# Altium PCB LY-LYJ-001V1.2.PcbDoc (part 2 of 2)
Units mm, origin at the board's own origin, x right, y up, seen from the top; angles counter-clockwise.
Board outline 190 x 47.13 mm, 2 copper layers (Top Layer, Bottom Layer); 162 components, 177 nets, 655 pads, 417 vias.
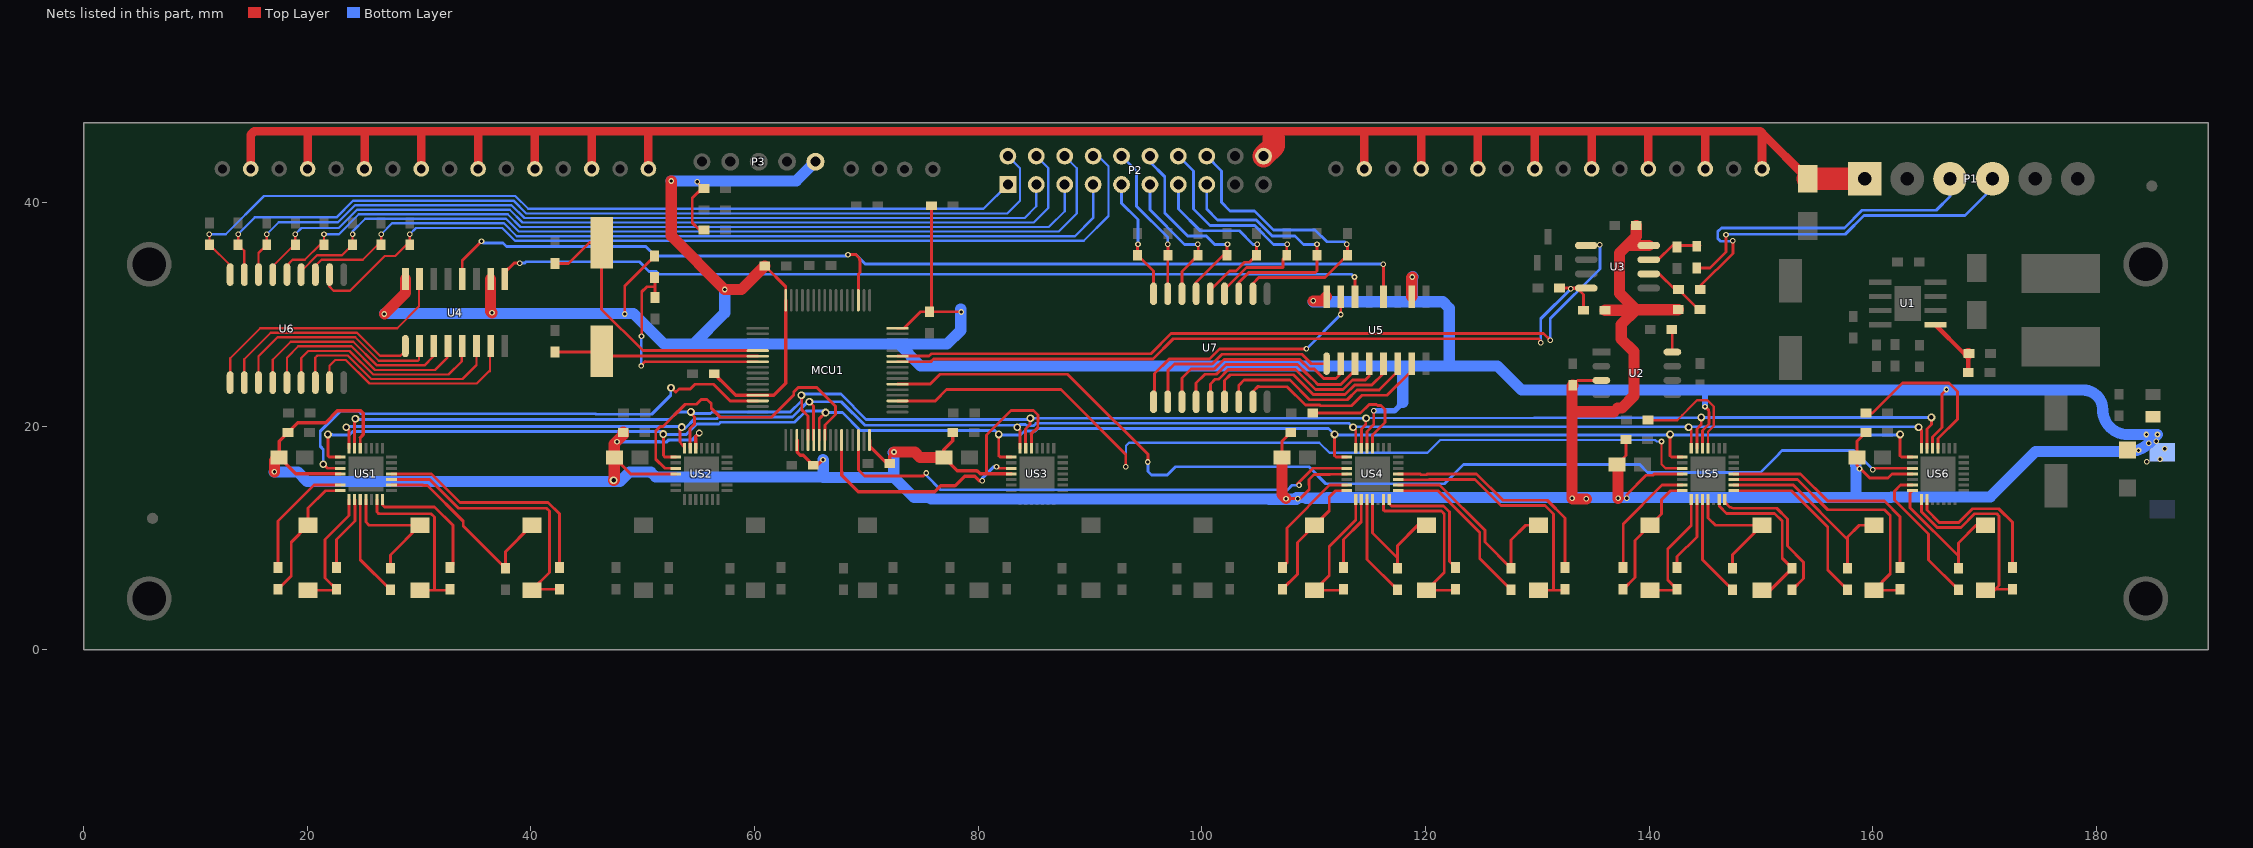
[diagram p2: the nets of this part, all layers, seen from the top]

## Via types
v1: diameter 0.5, hole 0.3, Top Layer to Bottom Layer, 382 vias
v2: diameter 0.7, hole 0.4, Top Layer to Bottom Layer, 33 vias
v3: diameter 0.6, hole 0.4, Top Layer to Bottom Layer, 2 vias

## Nets (pads, with @x,y where several pads share a name; then routed paths per layer and width w, separated by ;. In a path a pad name is that pad's centre, name@x,y a point inside that pad or via, vN(x,y) a via of type N, cw(c..) or ccw(c..) an arc to the next point about the centre after c; other vN are vias at no path point) (continued)
NetR17_2: R17.2 S3.2 US1.16 | length 18.3
  Top Layer w0.254: US1.16@27.532,14.732 30.336,14.732 30.379,14.689 30.76,14.689 33.953,11.496 33.953,11.065 R17.2@37.719,7.3 37.719,8.775 S3.2@40.08,11.136
NetR18_1: R18.1 US1.18 | length 21.3
  Top Layer w0.254: US1.18@27.533,15.732 31.103,15.732 33.667,13.168 41.541,13.168 42.545,12.164 R18.1@42.545,7.352
NetR18_2: R18.2 S3.1 US1.17 | length 25.5
  Top Layer w0.254: US1.17@27.533,15.232 30.956,15.232 33.528,12.66 41.402,12.66 41.656,12.406 41.656,6.912 S3.1@40.08,5.336 40.164,5.42 R18.2@42.545,5.42
NetR19_1: R19.1 US1.10 | length 9.2
  Top Layer w0.254: US1.10@24.74,13.445 24.74,8.06 R19.1@27.432,5.368
NetR19_2: R19.2 S2.2 US1.11 | length 11.9
  Top Layer w0.254: US1.11@25.24,13.445 25.24,11.423 25.527,11.136 S2.2@30.08,11.136 27.432,8.488 R19.2@27.432,7.3
NetR20_1: R20.1 US1.14 | length 11.4
  Top Layer w0.254: US1.14@26.74,13.443 26.74,12.971 26.924,12.787 31.369,12.787 33.02,11.136 33.02,7.606 R20.1@32.766,7.352
NetR20_2: R20.2 S2.1 US1.13 | length 15.6
  Top Layer w0.254: US1.13@26.24,13.445 26.24,12.328 26.402,12.166 31.067,12.166 31.369,11.864 31.369,5.336 ; S2.1@30.08,5.336 31.369,5.336 ; R20.2@32.682,5.336 31.369,5.336
NetR21_1: R21.1 US1.6 | length 11
  Top Layer w0.254: R21.1@17.399,7.352 17.399,11.517 20.614,14.732 US1.6@22.95,14.732
NetR21_2: R21.2 S1.2 US1.7 | length 11.9
  Top Layer w0.254: R21.2@17.399,5.42 18.567,6.589 18.567,9.624 S1.2@20.08,11.136 20.08,12.674 21.638,14.232 US1.7@22.948,14.232
NetR22_1: R22.1 US1.9 | length 6.8
  Top Layer w0.254: R22.1@22.606,7.352 22.606,9.866 24.257,11.517 24.257,13.428 US1.9@24.24,13.445
NetR22_2: R22.2 S1.1 US1.8 | length 11.9
  Top Layer w0.254: S1.1@20.08,5.336 22.522,5.336 R22.2@22.606,5.42 21.59,6.436 21.59,9.866 23.74,12.016 US1.8@23.74,13.443
NetR24_1: R24.1 U2.8 | length 2.1
  Top Layer w0.254: R24.1@142.011,28.662 142.061,28.613 U2.8@142.061,26.63
NetR26_1: R26.1 R27.2 U1.5 | length 5.8
  Top Layer w0.4: U1.5@165.58,29.066 168.143,26.503 R27.2@168.504,26.503 ; R26.1@168.528,24.725 R27.2@168.528,26.479
  Top Layer w1: R27.2@168.504,26.503 R27.2@168.528,26.479
NetR29_1: R29.1 US4.25 | length 10.9
  Top Layer w0.254: R29.1@109.918,21.169 114.176,21.169 114.96,21.953 115.607,21.953 115.705,21.855 116.002,21.855 116.357,21.499 116.357,20.331 115.251,19.225 US4.25@115.251,18.025
NetR30_1: R30.1 US5.25 | length 10.8
  Top Layer w0.203: R30.1@139.89,20.534 142.494,20.534 142.939,20.979 143.827,21.868 144.272,22.312 144.276,22.308 145.213,22.308 145.765,21.756 145.765,20.008 145.255,19.498 US5.25@145.255,18.025
NetR31_1: R31.1 US6.25 | length 15.4
  Top Layer w0.254: R31.1@159.37,21.164 159.952,21.164 162.645,23.858 166.814,23.858 167.564,23.107 167.564,20.624 165.829,18.89 US6.25@165.829,18.025
NetR35_1: R35.1 US4.15 | length 15.1
  Top Layer w0.254: US4.15@117.547,14.232 121.11,14.232 124.841,10.501 124.841,8.162 R35.1@127.635,5.368
NetR35_2: R35.2 S12.2 US4.16 | length 19.3
  Top Layer w0.254: US4.16@117.544,14.732 121.257,14.732 125.298,10.691 125.298,9.637 R35.2@127.635,7.3 127.635,9.815 128.956,11.136 S12.2@130.08,11.136
NetR36_1: R36.1 US4.18 | length 21
  Top Layer w0.254: US4.18@117.544,15.732 119.526,15.732 119.597,15.661 120.078,15.661 120.148,15.732 124.563,15.732 126.924,13.371 130.872,13.371 132.461,11.783 R36.1@132.461,7.352
NetR36_2: R36.2 S12.1 US4.17 | length 24.4
  Top Layer w0.254: US4.17@117.544,15.232 117.572,15.204 120.267,15.204 120.295,15.232 124.416,15.232 126.734,12.914 130.683,12.914 131.445,12.152 131.445,5.336 ; S12.1@130.08,5.336 131.445,5.336 ; R36.2@132.461,5.42 132.377,5.336 131.445,5.336
NetR37_1: R37.1 US4.10 | length 9.2
  Top Layer w0.254: US4.10@114.751,13.445 114.751,8.092 R37.1@117.475,5.368
NetR37_2: R37.2 S11.2 US4.11 | length 12.4
  Top Layer w0.254: US4.11@115.251,13.445 115.251,10.439 117.475,8.215 R37.2@117.475,7.3 117.475,9.307 119.304,11.136 S11.2@120.08,11.136
NetR38_1: R38.1 US4.14 | length 11.3
  Top Layer w0.254: US4.14@116.751,13.443 116.751,13.071 116.959,12.863 121.601,12.863 122.123,12.342 122.123,7.91 R38.1@122.682,7.352
NetR38_2: R38.2 S11.1 US4.13 | length 16.6
  Top Layer w0.254: US4.13@116.251,13.445 116.251,12.487 116.332,12.406 121.412,12.406 121.666,12.152 121.666,6.922 S11.1@120.08,5.336 122.598,5.336 R38.2@122.682,5.42
NetR39_1: R39.1 US4.6 | length 10.7
  Top Layer w0.254: R39.1@107.188,7.352 107.594,7.758 107.594,10.908 111.419,14.732 US4.6@112.962,14.732
NetR39_2: R39.2 S10.2 US4.7 | length 11.8
  Top Layer w0.254: R39.2@107.188,5.42 108.534,6.767 108.534,9.59 S10.2@110.08,11.136 111.379,12.435 111.379,13.676 111.935,14.232 US4.7@112.959,14.232
NetR40_1: R40.1 US4.9 | length 6.8
  Top Layer w0.254: R40.1@112.649,7.352 112.649,9.855 114.251,11.457 US4.9@114.251,13.445
NetR40_2: R40.2 S10.1 US4.8 | length 12.2
  Top Layer w0.254: R40.2@112.649,5.42 112.565,5.336 S10.1@110.08,5.336 111.379,6.635 111.379,9.231 113.751,11.604 US4.8@113.751,13.443
NetR41_1: R41.1 US5.15 | length 16.1
  Top Layer w0.254: US5.15@147.55,14.232 152.721,14.232 155.956,10.998 155.956,7.146 R41.1@157.734,5.368
NetR41_2: R41.2 S15.2 US5.16 | length 20.3
  Top Layer w0.254: US5.16@147.547,14.732 152.868,14.732 157.734,9.866 R41.2@157.734,7.3 157.734,10.095 158.775,11.136 S15.2@160.08,11.136
NetR42_1: R42.1 US5.18 | length 21
  Top Layer w0.254: US5.18@147.548,15.732 153.519,15.732 155.956,13.295 161.036,13.295 162.433,11.898 R42.1@162.433,7.352
NetR42_2: R42.2 S15.1 US5.17 | length 25
  Top Layer w0.254: US5.17@147.548,15.232 153.257,15.232 155.956,12.533 161.036,12.533 161.544,12.025 161.544,6.8 S15.1@160.08,5.336 162.349,5.336 R42.2@162.433,5.42
NetR43_1: R43.1 US5.10 | length 9.2
  Top Layer w0.254: US5.10@144.755,13.445 144.755,8.06 R43.1@147.447,5.368
NetR43_2: R43.2 S14.2 US5.11 | length 11.7
  Top Layer w0.254: US5.11@145.255,13.445 145.255,11.804 145.923,11.136 S14.2@150.08,11.136 147.447,8.503 R43.2@147.447,7.3
NetR44_1: R44.1 US5.14 | length 13.8
  Top Layer w0.254: US5.14@146.755,13.443 146.794,13.168 147.185,12.777 147.538,12.66 151.396,12.66 152.349,11.707 152.349,9.282 153.797,7.834 153.797,6.384 R44.1@152.781,5.368
NetR44_2: R44.2 S14.1 US5.13 | length 14.9
  Top Layer w0.254: US5.13@146.255,13.445 146.255,12.861 146.913,12.203 151.206,12.203 151.892,11.517 151.892,8.189 R44.2@152.781,7.3 150.817,5.336 S14.1@150.08,5.336
NetR45_1: R45.1 US5.6 | length 10.6
  Top Layer w0.254: R45.1@137.668,7.352 137.668,11.263 141.137,14.732 US5.6@142.965,14.732
NetR45_2: R45.2 S13.2 US5.7 | length 11.6
  Top Layer w0.254: R45.2@137.668,5.42 138.709,6.462 138.709,9.766 S13.2@140.08,11.136 141.097,12.153 141.097,13.422 141.907,14.232 US5.7@142.963,14.232
NetR46_1: R46.1 US5.9 | length 6.8
  Top Layer w0.254: R46.1@142.494,7.352 142.494,8.342 144.255,10.103 US5.9@144.255,13.445
NetR46_2: R46.2 S13.1 US5.8 | length 11.7
  Top Layer w0.254: S13.1@140.08,5.336 142.41,5.336 R46.2@142.494,5.42 141.656,6.259 141.656,9.028 143.755,11.127 US5.8@143.755,13.443
NetR47_1: R47.1 US6.6 | length 13
  Top Layer w0.254: US6.6@163.539,14.732 162.473,14.732 161.925,14.184 161.925,13.411 164.973,10.363 164.973,8.035 R47.1@167.64,5.368
NetR47_2: R47.2 S16.2 US6.7 | length 13.1
  Top Layer w0.254: US6.7@163.537,14.232 163.524,14.232 163.322,14.03 163.322,12.711 167.64,8.393 ; R47.2@167.64,7.3 167.64,8.393 ; S16.2@170.08,11.136 169.215,11.136 167.64,9.561 167.64,8.393
NetR48_1: R48.1 US6.9 | length 14.1
  Top Layer w0.254: US6.9@164.829,13.445 164.829,12.497 165.936,11.39 167.67,11.39 168.904,12.624 171.256,12.624 172.466,11.414 R48.1@172.466,7.352
NetR48_2: R48.2 S16.1 US6.8 | length 19.2
  Top Layer w0.254: US6.8@164.329,13.443 164.329,12.35 165.747,10.933 167.86,10.933 169.093,12.166 171.067,12.166 171.26,11.973 171.26,5.739 170.857,5.336 S16.1@170.08,5.336 170.164,5.42 R48.2@172.466,5.42
NetR49_2: R49.2 R51.2 U3.7 | length 5.1
  Top Layer w0.254: U3.7@139.954,34.885 140.792,34.885 142.063,36.156 142.494,36.156 R49.2@144.526,36.156
NetR50_2: R50.2 R52.2 U3.6 | length 5.9
  Top Layer w0.254: U3.6@139.954,33.615 140.894,33.615 142.291,32.218 R50.2@142.62,32.218 144.398,30.44 R52.2@144.527,30.44
NetU4_9: U4.9 U5.14 | length 79.4
  Top Layer w0.254: U4.9@37.668,33.164 37.668,33.768 38.506,34.606 38.532,34.58 v1(39.014,34.58) ; v1(113.64,33.336) 113.69,33.285 U5.14@113.69,31.589
  Bottom Layer w0.254: v1(39.014,34.58) 39.446,34.58 39.573,34.707 49.698,34.707 50.566,33.84 51.213,33.84 51.463,33.59 113.386,33.59 v1@113.69,33.285
NRST: C23.2 MCU1.7 R53.1 | length 20.4
  Top Layer w0.254: v1(49.86,25.386) 49.86,25.436 50.216,25.792 50.248,25.76 MCU1.7@60.282,25.76 ; v1(49.886,28.027) 49.911,28.053 49.911,32.015 50.368,32.472 51.058,32.472 51.083,32.447 ; R53.1@51.068,33.285 51.083,33.27 51.083,32.447 ; C23.2@51.083,31.503 51.083,32.447
  Bottom Layer w0.254: v1(49.86,25.386) v1@49.86,28.027
OSC8MIN: C21.2 MCU1.5 X1.1 | length 26.4
  Top Layer w0.254: C21.2@42.151,34.534 43.362,34.534 45.237,36.409 X1.1@46.321,36.409 46.321,30.448 50.009,26.76 MCU1.5@60.282,26.76
OSC8MOUT: C20.2 MCU1.6 X1.2 | length 18.3
  Top Layer w0.254: C20.2@42.151,26.634 46.274,26.634 X1.2@46.321,26.681 46.742,26.26 MCU1.6@60.282,26.26
OUT1: P2.1 R59.1 U6.18 | length 78.6
  Top Layer w0.203: v1(11.252,37.171) 11.269,37.155 R59.1@11.269,36.231 13.106,34.394 U6.18@13.106,33.554
  Bottom Layer w0.203: v1(11.252,37.171) 12.725,37.171 16.129,40.575 38.611,40.575 39.754,39.432 80.472,39.432 P2.1@82.652,41.611
OUT2: P2.2 R60.1 U6.17 | length 80.4
  Top Layer w0.203: v1(13.818,37.171) 13.826,37.163 R60.1@13.826,36.231 14.376,35.681 U6.17@14.376,33.554
  Bottom Layer w0.203: v1(13.818,37.171) 15.316,38.67 22.609,38.67 24.108,40.168 38.443,40.168 39.586,39.025 82.601,39.025 83.73,40.155 83.73,43.073 P2.2@82.652,44.151
OUT3: P2.3 R61.1 U6.16 | length 76.7
  Top Layer w0.203: U6.16@15.646,33.554 15.646,35.495 R61.1@16.383,36.231 v1(16.383,37.171)
  Bottom Layer w0.203: v1(16.383,37.171) 17.449,38.238 22.752,38.238 24.276,39.762 38.275,39.762 39.418,38.619 84.15,38.619 85.192,39.66 P2.3@85.192,41.611
OUT4: P2.4 R62.1 U6.15 | length 78.8
  Top Layer w0.203: U6.15@16.916,33.554 16.916,34.301 18.847,36.231 R62.1@18.94,36.231 v1(18.94,37.171)
  Bottom Layer w0.203: v1(18.94,37.171) 19.494,37.726 22.815,37.726 24.444,39.356 38.106,39.356 39.249,38.213 84.963,38.213 86.258,39.508 86.258,43.084 P2.4@85.192,44.151
OUT5: P2.5 R63.1 U6.14 | length 76.3
  Top Layer w0.203: U6.14@18.186,33.554 18.186,34.377 18.684,34.875 19.776,34.875 21.133,36.231 R63.1@21.497,36.231 v1(21.497,37.171)
  Bottom Layer w0.203: v1(21.497,37.171) 22.835,37.171 24.613,38.949 37.938,38.949 39.081,37.806 86.309,37.806 87.732,39.229 P2.5@87.732,41.611
OUT6: P2.6 R64.1 U6.13 | length 79
  Top Layer w0.203: U6.13@19.456,33.554 19.456,33.857 20.88,35.281 23.103,35.281 R64.1@24.053,36.231 v1(24.053,37.171)
  Bottom Layer w0.203: v1(24.053,37.171) 24.053,37.399 25.197,38.543 37.77,38.543 38.913,37.4 87.198,37.4 88.81,39.012 88.81,43.073 P2.6@87.732,44.151
OUT7: P2.7 R65.1 U6.12 | length 76.6
  Top Layer w0.203: U6.12@20.726,33.554 20.726,34.326 21.275,34.875 24.958,34.875 26.314,36.231 R65.1@26.61,36.231 v1(26.61,37.171)
  Bottom Layer w0.203: v1(26.61,37.171) 27.576,38.136 37.601,38.136 38.744,36.993 88.646,36.993 90.272,38.619 P2.7@90.272,41.611
OUT8: P2.8 R66.1 U6.11 | length 81.4
  Top Layer w0.203: U6.11@21.996,33.554 21.996,32.574 21.946,32.523 22.352,32.117 23.825,32.117 26.924,35.215 27.864,35.215 28.88,36.231 R66.1@29.167,36.231 v1(29.167,37.171)
  Bottom Layer w0.203: v1(29.167,37.171) 29.726,37.73 37.433,37.73 38.576,36.587 89.433,36.587 91.643,38.797 91.643,43.242 90.734,44.151 P2.8@90.272,44.151
OUT9: P2.9 R67.1 U7.18 | length 11
  Top Layer w0.254: v1(94.285,36.257) 94.251,36.223 R67.1@94.251,35.292 95.673,33.869 U7.18@95.673,31.837
  Bottom Layer w0.254: P2.9@92.812,41.611 92.812,39.94 94.285,38.467 v1(94.285,36.257)
OUT10: P2.10 R68.1 U7.17 | length 14
  Top Layer w0.254: U7.17@96.943,31.837 96.943,35.275 R68.1@96.96,35.292 96.96,36.249 v1(96.952,36.257)
  Bottom Layer w0.254: P2.10@92.812,44.151 94.158,42.805 94.158,39.66 96.952,36.866 v1(96.952,36.257)
OUT11: P2.11 R69.1 U7.16 | length 12.8
  Top Layer w0.254: U7.16@98.213,31.837 98.213,33.835 R69.1@99.669,35.292 99.669,36.206 v1(99.619,36.257)
  Bottom Layer w0.254: P2.11@95.352,41.611 95.352,39.356 98.45,36.257 v1(99.619,36.257)
OUT12: P2.12 R70.1 U7.15 | length 18.2
  Top Layer w0.254: U7.15@99.483,31.837 99.483,32.844 101.93,35.292 R70.1@102.252,35.292 102.252,36.223 v1(102.286,36.257)
  Bottom Layer w0.254: P2.12@95.352,44.151 95.352,43.623 96.672,42.302 96.672,39.076 98.73,37.019 100.381,37.019 101.143,36.257 v1(102.286,36.257)
OUT13: P2.13 R71.1 U7.14 | length 17.3
  Top Layer w0.254: U7.14@100.753,31.837 100.753,32.176 102.456,33.879 103.035,33.879 103.812,34.657 104.241,34.657 R71.1@104.876,35.292 104.876,36.18 v1(104.953,36.257)
  Bottom Layer w0.254: P2.13@97.892,41.611 97.892,39.432 99.847,37.476 103.353,37.476 104.572,36.257 v1(104.953,36.257)
OUT14: P2.14 R72.1 U7.13 | length 23.6
  Top Layer w0.254: U7.13@102.023,31.837 102.023,32.221 104.001,34.199 107.239,34.199 107.239,34.945 R72.1@107.586,35.292 107.586,36.223 v1(107.62,36.257)
  Bottom Layer w0.254: P2.14@97.892,44.151 99.238,42.805 99.238,39.432 100.736,37.933 104.724,37.933 106.401,36.257 v1(107.62,36.257)
OUT15: P2.15 R73.1 U7.12 | length 24.2
  Top Layer w0.254: U7.12@103.293,31.837 103.293,32.844 104.191,33.742 110.16,33.742 110.295,33.877 R73.1@110.295,35.292 110.295,36.249 v1(110.287,36.257)
  Bottom Layer w0.254: P2.15@100.432,41.611 100.432,39.406 101.397,38.441 104.863,38.441 106.285,37.019 108.331,37.019 109.093,36.257 v1(110.287,36.257)
OUT16: P2.16 R74.1 U7.11 | length 28.8
  Top Layer w0.254: U7.11@104.563,31.837 104.563,32.768 105.08,33.285 110.998,33.285 R74.1@113.004,35.292 113.004,36.206 v1(112.954,36.257)
  Bottom Layer w0.254: P2.16@100.432,44.151 101.752,42.83 101.752,40.016 102.514,39.254 104.697,39.254 106.398,37.552 110.109,37.552 111.176,36.485 112.725,36.485 v1(112.954,36.257)
OUTA: P1.3 R50.1 | length 31.3
  Top Layer w0.254: R50.1@144.551,32.218 144.551,32.521 147.472,35.442 v1(147.472,36.587)
  Bottom Layer w0.254: v1(147.472,36.587) 147.426,36.54 146.376,36.54 146.126,36.79 146.126,37.4 146.456,37.73 157.443,37.73 159.018,39.305 165.659,39.305 166.889,40.535 P1.3@166.889,42.124
OUTB: P1.4 R49.1 | length 31.1
  Top Layer w0.254: R49.1@144.247,34.149 145.44,34.149 146.863,35.571 v1(146.863,37.12)
  Bottom Layer w0.254: v1(146.863,37.12) 146.91,37.167 157.527,37.167 159.207,38.848 168.224,38.848 170.688,41.311 P1.4@170.688,42.124
S_LED1: U4.15 U6.1 | length 23.8
  Top Layer w0.203: U6.1@13.106,23.902 13.106,26.071 15.799,28.764 28.042,28.764 29.997,30.72 U4.15@29.997,33.57
S_LED2: U4.1 U6.2 | length 19.8
  Top Layer w0.203: U6.2@14.376,23.43 14.376,25.995 16.739,28.357 24.46,28.357 26.518,26.3 28.346,26.3 28.727,26.681 U4.1@28.727,27.57
S_LED3: U4.2 U6.3 | length 20.4
  Top Layer w0.203: U6.3@15.646,23.43 15.646,26.249 17.348,27.951 24.292,27.951 26.4,25.843 29.896,25.843 29.997,25.944 U4.2@29.997,27.57
S_LED4: U4.3 U6.4 | length 20.1
  Top Layer w0.203: U6.4@16.916,23.43 16.916,25.944 18.517,27.545 24.124,27.545 26.232,25.436 30.48,25.436 31.267,26.224 U4.3@31.267,27.57
S_LED5: U4.4 U6.5 | length 20.2
  Top Layer w0.203: U6.5@18.186,23.43 18.186,26.122 19.202,27.138 23.955,27.138 26.063,25.03 31.42,25.03 32.537,26.148 U4.4@32.537,27.57
S_LED6: U4.5 U6.6 | length 20.4
  Top Layer w0.203: U6.6@19.456,23.43 19.456,26.097 20.091,26.732 23.787,26.732 25.895,24.624 32.639,24.624 33.807,25.792 U4.5@33.807,27.57
S_LED7: U4.6 U6.7 | length 20.2
  Top Layer w0.203: U6.7@20.726,23.902 20.726,26.122 20.93,26.325 23.619,26.325 25.727,24.217 33.884,24.217 35.128,25.462 35.128,27.519 U4.6@35.077,27.57
S_LED8: U4.7 U6.8 | length 20.1
  Top Layer w0.203: U6.8@21.996,23.902 21.996,25.411 22.504,25.919 23.45,25.919 25.558,23.811 35.154,23.811 36.297,24.954 36.347,24.903 U4.7@36.347,27.57
S_LED9: U5.15 U7.1 | length 23
  Top Layer w0.254: U7.1@95.673,22.185 95.758,22.27 95.758,24.7 97.079,26.021 100.686,26.021 101.575,26.91 v1(109.347,26.91) ; v1(112.42,29.983) U5.15@112.42,31.589
  Bottom Layer w0.254: v1(109.347,26.91) v1(112.42,29.983)
S_LED10: U5.1 U7.2 | length 17.9
  Top Layer w0.254: U7.2@96.943,22.185 96.977,22.219 96.977,25.005 97.536,25.563 100.875,25.563 100.9,25.589 100.944,25.589 101.782,26.427 108.938,26.427 109.777,25.589 U5.1@111.15,25.589
S_LED11: U5.2 U7.3 | length 18.8
  Top Layer w0.254: U7.3@98.213,22.185 98.213,24.31 99.009,25.106 101.064,25.106 101.09,25.132 101.133,25.132 101.972,25.97 108.749,25.97 109.613,25.106 110.042,25.106 110.889,24.259 111.979,24.259 112.42,24.7 U5.2@112.42,25.589
S_LED12: U5.3 U7.4 | length 18.4
  Top Layer w0.254: U7.4@99.483,22.185 99.483,23.853 100.279,24.649 101.254,24.649 101.279,24.674 101.323,24.674 102.161,25.513 108.56,25.513 109.423,24.649 109.449,24.649 110.236,23.862 110.236,23.836 110.338,23.735 112.42,23.735 113.69,25.005 U5.3@113.69,25.589
S_LED13: U5.4 U7.5 | length 18.7
  Top Layer w0.254: U7.5@100.753,22.185 100.753,23.777 101.168,24.192 101.443,24.192 101.469,24.217 101.512,24.217 102.35,25.055 108.37,25.055 110.148,23.277 112.61,23.277 113.473,24.141 114.605,24.141 114.96,24.497 U5.4@114.96,25.589
S_LED14: U5.5 U7.6 | length 18.7
  Top Layer w0.254: U7.6@102.023,22.185 102.023,24.081 102.54,24.598 108.181,24.598 109.959,22.82 112.799,22.82 113.663,23.684 115.189,23.684 116.23,24.725 U5.5@116.23,25.589
S_LED15: U5.6 U7.7 | length 18.4
  Top Layer w0.254: U7.7@103.293,22.185 103.293,23.65 103.762,24.119 107.852,24.119 107.861,24.128 109.626,22.363 112.989,22.363 113.852,23.227 115.849,23.227 117.5,24.878 U5.6@117.5,25.589
S_LED16: U5.7 U7.8 | length 17.9
  Top Layer w0.254: U7.8@104.563,22.185 104.563,23.091 105.042,23.57 105.08,23.531 107.62,23.531 109.252,21.899 110.538,21.899 110.607,21.83 113.36,21.83 114.3,22.769 116.561,22.769 118.77,24.979 U5.7@118.77,25.589
SPI_CLK: MCU1.21 US1.27 US2.27 US3.27 US4.27 US5.27 US6.27 | length 165.2
  Top Layer w0.254: US1.27@24.24,18.025 v2@24.24,20.594 ; US2.27@54.238,18.05 54.238,19.781 54.635,20.179 54.635,20.814 54.305,21.144 v2(54.305,21.271) ; v2(64.186,22.769) 64.287,22.668 64.287,22.538 64.217,22.467 64.217,21.468 64.782,20.903 MCU1.21@64.782,18.76 ; US3.27@84.235,18.025 84.235,19.755 84.633,20.153 v2(84.658,20.712) ; US4.27@114.258,18.025 114.258,19.755 114.656,20.153 v2(114.681,20.712) ; US5.27@144.255,18.025 144.255,19.755 144.653,20.153 v2(144.653,20.788) ; US6.27@164.829,18.025 164.829,19.755 165.227,20.153 v2(165.227,20.788)
  Bottom Layer w0.254: v2(24.308,20.661) 24.364,20.605 51.825,20.605 51.839,20.591 52.403,20.591 53.083,21.271 v2(54.305,21.271) 54.453,21.123 56.063,21.123 56.21,21.271 63.195,21.271 64.186,22.261 v2(64.186,22.769) 64.282,22.865 67.722,22.865 69.977,20.61 84.455,20.61 v2(84.658,20.712) v2(114.681,20.712) v2(144.653,20.788) v2(165.227,20.788)
SPI_EN1: MCU1.14 US1.3 | length 47.2
  Top Layer w0.254: v2(21.438,16.597) 21.803,16.232 US1.3@22.95,16.232 ; v2(52.527,23.43) 52.527,23.455 52.934,23.049 52.95,23.049 53.229,23.328 54.243,23.328 54.67,23.755 56.328,23.755 57.823,22.26 MCU1.14@60.282,22.26
  Bottom Layer w0.254: v2(21.438,16.597) 21.438,17.929 21.164,18.203 21.164,19.546 22.959,21.341 24.59,21.341 24.813,21.118 45.771,21.118 45.822,21.068 50.8,21.068 52.502,22.769 v2@52.502,23.481
SPI_EN2: MCU1.24 US2.3 | length 28.1
  Top Layer w0.254: US2.3@52.954,16.232 51.978,16.232 51.161,17.049 51.161,19.571 51.56,19.97 51.81,19.97 53.797,21.957 54.811,21.957 55.238,22.384 55.76,22.384 56.129,22.014 56.129,21.606 56.932,20.803 61.508,20.803 63.506,22.8 63.506,23.051 63.904,23.45 65.563,23.45 67.234,21.779 67.234,21.042 66.282,20.091 MCU1.24@66.282,18.76
SPI_EN3: MCU1.27 US3.3 | length 20.4
  Top Layer w0.203: v1(81.636,16.369) 81.772,16.232 US3.3@82.958,16.232
  Top Layer w0.254: 67.782,15.922 MCU1.27@67.782,18.76
  Top Layer w0.3: 67.782,15.922 67.782,15.612 69.259,14.136 76.106,14.136 76.637,14.667 77.927,14.667 78.784,15.524 79.68,15.524 80.08,15.124 v1(80.366,15.124)
  Bottom Layer w0.3: v1(80.366,15.124) 80.366,15.327 81.407,16.369 v1(81.636,16.369)
SPI_EN4: MCU1.30 US4.3 | length 48.3
  Top Layer w0.254: MCU1.30@69.282,18.76 69.282,16.084 69.836,15.53 75.082,15.53 v1(75.362,15.81) ; v1@108.55,14.854 109.928,16.232 US4.3@112.962,16.232
  Bottom Layer w0.254: v1(75.362,15.81) 75.362,15.581 76.632,14.311 106.807,14.311 ; 106.815,14.303 107.637,14.303 108.052,14.718 v1(108.687,14.718)
SPI_EN5: MCU1.35 US5.3 | length 79.1
  Top Layer w0.203: v1(141.097,18.629) 141.097,16.597 141.453,16.242 ; 141.462,16.232 US5.3@142.965,16.232
  Top Layer w0.254: MCU1.35@72.782,22.26 76.15,22.26 77.157,23.267 87.386,23.267 93.189,17.465 93.189,16.466 93.174,16.452 v1@93.203,16.452
  Bottom Layer w0.203: v1(93.203,16.369) 93.203,18.259 93.472,18.528 110.492,18.528 111.402,17.617 120.165,17.617 121.319,18.772 140.523,18.772 140.665,18.629 v1(141.097,18.629)
SPI_EN6: MCU1.38 US6.3 | length 99.2
  Top Layer w0.254: MCU1.38@72.782,23.76 75.71,23.76 76.589,24.639 87.982,24.639 92.271,20.35 92.31,20.35 95.174,17.486 v1@95.174,16.826 ; v1(159.995,16.115) 160.112,16.232 US6.3@163.539,16.232
  Bottom Layer w0.254: v1(95.165,16.8) 95.165,15.945 95.479,15.632 96.901,15.632 97.638,16.369 109.564,16.369 111.074,14.859 121.68,14.859 123.382,16.561 139.156,16.561 139.856,15.861 149.942,15.861 151.609,17.528 151.609,17.558 151.867,17.816 158.293,17.816 v1(159.995,16.115)
SPI_MISO: MCU1.22 US1.28 US2.28 US3.28 US4.28 US5.28 US6.28 | length 158.6
  Top Layer w0.254: v2(23.495,19.899) 23.74,19.654 US1.28@23.74,18.028 ; v2(53.492,19.925) 53.331,19.763 53.331,18.587 US2.28@53.738,18.053 ; v2(64.897,22.185) 65.282,21.8 MCU1.22@65.282,18.76 ; v2(83.49,19.899) 83.735,19.654 US3.28@83.735,18.028 ; v2(113.513,19.899) 113.758,19.654 US4.28@113.758,18.028 ; v2(143.51,19.899) 143.755,19.654 US5.28@143.755,18.028 ; v2(164.084,19.899) 164.329,19.654 US6.28@164.329,18.028
  Bottom Layer w0.254: v2(23.495,19.899) 23.566,19.97 53.447,19.97 v2(53.492,19.925) 53.512,19.944 53.659,19.798 53.794,19.798 54.658,20.661 56.617,20.661 56.769,20.814 63.385,20.814 64.756,22.185 v2(64.897,22.185) 67.756,22.185 69.864,20.077 83.312,20.077 v2(83.49,19.899) 83.744,20.153 84.218,20.153 84.316,20.055 84.335,20.073 84.376,20.032 84.94,20.032 85.163,20.255 113.157,20.255 v2(113.513,19.899) 113.558,19.944 164.039,19.944 v2(164.084,19.899)
SPI_MOSI: MCU1.23 US1.1 US2.1 US3.1 US4.1 US5.1 US6.1 | length 164.3
  Top Layer w0.254: v2(21.844,19.264) 21.844,17.359 21.971,17.232 US1.1@22.95,17.232 ; v2(51.841,19.29) 51.841,17.385 51.968,17.258 US2.1@52.948,17.258 ; MCU1.23@65.782,18.76 65.782,20.658 v2(66.345,21.22) ; v2(81.839,19.264) 81.839,17.359 81.966,17.232 US3.1@82.945,17.232 ; v2(111.862,19.264) 111.862,17.359 111.989,17.232 US4.1@112.968,17.232 ; v2(141.859,19.264) 141.859,17.359 141.986,17.232 US5.1@142.965,17.232 ; v2(162.433,19.264) 162.433,17.359 162.56,17.232 US6.1@163.539,17.232
  Bottom Layer w0.254: v2(21.844,19.264) 22.262,19.264 22.262,19.219 23.777,19.219 24.07,19.513 51.618,19.513 v2(51.841,19.29) 51.887,19.244 53.887,19.244 54.847,20.204 56.806,20.204 56.958,20.356 63.574,20.356 64.59,21.372 66.192,21.372 v2(66.345,21.22) 67.849,21.22 69.449,19.62 81.483,19.62 v2(81.839,19.264) 81.884,19.219 83.772,19.219 84.127,19.575 85.129,19.575 85.352,19.798 111.328,19.798 v2(111.862,19.264) 111.907,19.219 141.814,19.219 v2(141.859,19.264) 141.904,19.219 162.388,19.219 v2(162.433,19.264)
STR_595: MCU1.51 U4.12 U5.12 | length 93.5
  Top Layer w0.254: U4.12@33.858,33.164 33.858,34.809 v1(35.585,36.536) ; v1(68.351,35.338) 69.049,35.338 69.389,34.999 69.389,34.885 69.414,34.86 69.414,33.736 69.282,33.604 MCU1.51@69.282,31.26 ; v1(116.205,34.479) 116.23,34.453 U5.12@116.23,31.589
  Bottom Layer w0.254: v1(35.585,36.536) 35.738,36.384 37.516,36.384 37.821,36.079 50.267,36.079 51.134,35.211 68.224,35.211 v1(68.351,35.338) 69.071,35.338 69.901,34.508 116.176,34.508 v1(116.205,34.479)
USART1_RX: MCU1.43 U3.1 | length 69.8
  Top Layer w0.254: MCU1.43@72.782,26.26 75.603,26.26 75.821,26.478 95.439,26.478 97.243,28.281 130.556,28.281 v1(131.14,27.697)
  Bottom Layer w0.254: v1(131.14,27.697) 131.14,29.62 135.585,34.065 v1(135.585,36.231)
USART1_TX: MCU1.42 R33.1 R34.2 U3.4 | length 69.4
  Top Layer w0.254: MCU1.42@72.782,25.76 75.75,25.76 76,26.01 78.653,26.01 78.664,26.021 95.629,26.021 97.432,27.824 130.099,27.824 130.308,27.614 130.162,27.468 v1(130.302,27.468) ; R33.1@131.978,32.345 U3.4@133.934,32.345 ; v1(132.994,32.294) 133.579,32.294 134.111,31.762 R34.2@134.111,30.364
  Bottom Layer w0.254: v1(130.302,27.468) 130.302,29.602 v1(132.994,32.294)
VCC3.3V: C2.2 C3.2 C4.2 C5.2 C6.2 C7.2 C8.1 C14.2 C15.2 C16.2 C17.2 C18.2 C19.2 C22.1 C24.1 C25.2 C26.2 C27.1 C30.1 L2.2 MCU1.13 MCU1.19 MCU1.32 MCU1.48 MCU1.64 P3.1 R28.2 R32.1 R34.1 R52.1 R53.2 R55.1 R58.1 TVS1.2 U2.3 U3.8 U4.10 U4.16 U5.10 U5.16 US1.4 US1.26 US2.4 US2.26 US3.4 US3.26 US4.4 US4.26 US5.4 US5.26 US6.4 US6.26 | length 641.8
  Top Layer w0.254: US1.26@24.74,18.025 24.74,18.985 ; C5.2@47.456,17.207 48.931,15.732 US2.4@52.954,15.732 ; v1(48.387,30.034) 48.387,32.535 R53.2@51.068,35.216 ; v1(54.864,41.845) R58.1@55.474,41.235 55.27,41.235 54.432,40.397 54.432,38.187 55.067,37.552 R55.1@55.474,37.552 ; C24.1@60.909,34.314 60.947,34.314 62.789,32.472 62.782,32.466 MCU1.64@62.782,31.26 ; MCU1.32@70.307,18.07 MCU1.32@70.307,18.735 ; MCU1.48@72.782,28.76 73.351,28.76 74.828,30.237 C27.1@75.629,30.237 ; R28.2@75.818,39.711 75.818,30.427 cw(c75.629,30.427) C27.1@75.629,30.237 ; v1(78.486,30.212) 78.461,30.237 C27.1@75.629,30.237 ; 80.747,15.732 80.747,19.213 82.925,21.392 84.94,21.392 85.338,20.994 85.338,20.398 85.323,20.383 85.323,19.879 ; US3.26@84.748,18.025 84.748,19.303 ; C17.2@107.154,17.207 107.154,18.659 C14.2@107.95,19.455 ; v1(107.518,13.524) 108.788,13.524 109.597,14.333 109.597,14.739 109.58,14.757 109.58,15.237 110.032,15.689 111.448,15.689 111.461,15.702 112.932,15.702 US4.4@112.962,15.732 ; US4.26@114.751,18.025 114.751,19.528 115.361,20.138 115.361,21.367 v1(115.367,21.372) ; C8.1@133.16,23.658 133.591,24.09 U2.3@135.714,24.09 ; v1(137.211,13.549) v1(137.998,13.549) 137.998,13.894 139.711,15.607 140.311,15.607 140.436,15.732 US5.4@142.965,15.732 ; C18.2@137.211,16.487 C18.2@137.126,16.572 137.922,17.368 C15.2@137.922,18.82 ; US5.26@144.755,18.025 144.755,19.609 145.333,20.187 145.333,21.256 145.313,21.276 145.313,21.423 v1(144.983,21.753) v1@144.932,21.753 ; C16.2@159.385,19.455 158.589,18.659 C19.2@158.589,17.207 158.589,16.504 159.715,15.378 161.341,15.378 161.695,15.732 US6.4@163.539,15.732 ; US6.26@165.329,18.025 165.329,19.036 166.167,19.874 166.167,22.871 v1(166.573,23.277)
  Top Layer w0.3: US1.4@22.95,15.732 18.966,15.732 C7.2@17.492,17.207 17.492,18.659 C4.2@18.288,19.455 19.138,20.306 21.641,20.306 22.7,21.364 24.798,21.364 25.011,21.152 25.011,19.256 24.74,18.985 ; US2.26@54.744,18.025 54.744,18.867 54.718,18.893 54.718,19.067 v3(55.042,19.391) ; C22.1@56.388,24.687 56.998,24.078 57.006,24.078 58.324,22.76 MCU1.13@60.282,22.76 61.713,22.76 62.782,23.83 MCU1.64@62.782,31.26 ; MCU1.19@63.802,18.76 63.802,17.69 64.085,17.407 64.35,17.407 C26.2@65.248,16.508 65.621,16.508 v1(66.116,17.004) ; MCU1.32@70.307,18.07 70.443,18.07 C25.2@72.106,16.407 ; C25.2@72.081,16.661 72.081,17.304 v1(72.466,17.689) ; C3.2@77.724,19.455 77.724,18.68 76.928,17.884 C6.2@76.928,17.207 78.107,16.027 79.888,16.027 80.183,15.732 80.747,15.732 US3.4@82.958,15.732 ; 84.748,19.303 85.323,19.879
  Top Layer w1: v1(17.069,15.926) 17.069,16.784 cw(c17.492,16.784) C7.2@17.492,17.207 ; v1(26.899,30.034) 28.778,31.913 U4.16@28.778,33.164 ; U4.10@36.398,33.164 36.398,30.262 v1(36.525,30.135) ; v2(47.396,15.164) ccw(c47.396,15.224) 47.456,15.224 C5.2@47.456,17.207 ; C5.2@47.396,17.147 C5.2@47.456,17.207 ; C2.2@48.252,19.455 48.252,19.231 47.422,18.401 47.456,18.366 C5.2@47.456,17.207 ; v1(52.553,41.921) 52.553,36.993 v1(57.328,32.218) 58.814,32.218 C24.1@60.909,34.314 ; v1(72.466,17.689) 74.32,17.689 74.803,17.207 C6.2@76.928,17.207 ; C17.2@107.154,17.207 107.154,13.888 v1(107.518,13.524) ; v1(109.957,31.202) 110.764,31.202 U5.16@111.15,31.589 ; U5.10@118.77,31.589 118.77,33.285 v1(118.821,33.336) ; C8.1@133.16,23.658 133.096,23.595 133.096,21.296 ; v1(134.366,13.498) 133.147,13.498 v1(133.096,13.549) 133.096,21.296 ; R34.1@136.042,30.364 138.76,30.364 ; v1(137.211,13.549) C18.2@137.211,16.487 ; R32.1@138.836,37.933 138.836,36.968 138.024,36.155 ; U3.8@139.954,36.155 138.024,36.155 ; R52.1@142.596,30.44 142.57,30.415 138.811,30.415 ; 133.096,21.296 136.844,21.296 137.185,21.637 137.552,21.637 138.633,22.719 138.633,26.656 137.49,27.799 137.49,29.094 138.76,30.364 ; 138.024,36.155 137.338,35.469 137.338,31.888 138.811,30.415 ; 138.76,30.364 138.811,30.415
  Bottom Layer w0.254: 144.983,22.871 145.339,23.227
  Bottom Layer w0.3: v1(47.701,18.604) 51.533,18.604 51.55,18.586 52.133,18.586 52.31,18.764 54.415,18.764 v3(55.042,19.391)
  Bottom Layer w0.5: v1(115.367,21.372) 117.221,21.372 117.958,22.109 ; v1(144.983,21.753) 144.983,22.871
  Bottom Layer w1: v1@17.057,15.898 19.163,15.898 19.999,15.062 47.968,15.062 48.805,15.899 50.712,15.899 51.168,15.443 66.142,15.443 66.142,16.978 v1(66.116,17.004) ; v1@26.899,30.085 49.176,30.085 51.919,27.341 54.559,27.341 ; v1(52.553,41.921) 63.72,41.921 P3.1@65.447,43.648 ; v1(57.328,32.218) 57.328,30.11 54.559,27.341 ; 66.142,15.418 72.441,15.418 72.441,17.588 v1@72.39,17.639 ; 72.39,15.494 74.259,13.625 75.802,13.625 75.802,13.481 105.985,13.481 105.985,13.473 108.467,13.473 108.467,13.625 109.308,13.625 109.308,13.561 109.861,13.561 109.865,13.557 110.658,13.557 110.662,13.561 111.215,13.561 111.215,13.625 158.496,13.625 ; 78.435,30.466 78.435,28.561 77.216,27.341 72.898,27.341 ; v1@109.957,31.126 118.821,31.126 ; 117.958,22.109 117.958,24.776 117.348,25.386 ; v1@118.847,33.361 v1(118.821,33.336) 118.821,31.126 ; 158.455,16.48 158.496,16.439 158.496,13.625 ; 54.559,27.341 72.898,27.341 ; 72.898,27.341 74.854,25.386 117.348,25.386 ; 117.348,25.386 122.123,25.386 ; 118.821,31.126 121.539,31.126 122.123,30.542 122.123,25.386 ; 122.123,25.386 126.416,25.386 128.575,23.227 145.339,23.227 178.805,23.227 cw(c178.805,21.488) 180.543,21.488 ccw(c182.778,21.488) 182.778,19.253 v1(185.445,19.253) v1(184.665,18.473) cw(c182.869,20.269) 182.869,17.729 174.538,17.729 170.485,13.676 161.671,13.676 161.62,13.625 158.496,13.625
  other v1: 108.56,13.498 158.801,16.191 184.48,16.815 185.674,17.043 183.744,17.831 186.08,17.983 185.344,18.644 184.455,19.253
VCC_IN: D1.1 LED3.A LED4.A LED5.A LED6.A LED7.A LED8.A LED9.A LED10.A LED11.A LED12.A LED13.A LED14.A LED15.A LED16.A LED17.A LED18.A P1.1 P2.20 | length 202.6
  Top Layer w0.762: LED3.A@14.953,43.003 14.953,46.054 15.265,46.366 20.244,46.366 ; LED4.A@20.033,43.003 20.033,46.156 20.244,46.366 ; LED5.A@25.164,42.901 25.164,46.054 ; LED6.A@30.201,42.858 30.201,46.01 ; LED7.A@35.273,43.003 35.273,46.13 35.509,46.366 ; LED8.A@40.353,43.003 40.353,46.181 40.538,46.366 ; LED9.A@45.433,43.003 45.433,46.333 45.466,46.366 ; LED10.A@50.513,43.003 50.513,46.272 50.419,46.366 ; 106.426,45.756 105.816,46.366 ; LED11.A@114.521,43.003 114.521,46.195 114.351,46.366 ; LED12.A@119.601,43.003 119.601,46.105 119.863,46.366 ; LED13.A@124.681,43.003 124.681,46.232 124.816,46.366 ; LED14.A@129.761,43.003 129.761,46.359 129.769,46.366 ; LED15.A@134.841,43.003 134.841,46.333 134.874,46.366 ; LED16.A@139.921,43.003 139.921,46.195 139.751,46.366 ; LED17.A@145.001,43.003 145.001,46.359 145.009,46.366 ; LED18.A@150.081,43.003 150.081,46.221 ; D1.1@154.178,42.124 150.081,46.221 ; 20.244,46.366 35.509,46.366 ; 35.509,46.366 40.538,46.366 ; 40.538,46.366 45.466,46.366 ; 45.466,46.366 50.419,46.366 ; 50.419,46.366 105.816,46.366 ; 105.816,46.366 114.351,46.366 ; 114.351,46.366 119.863,46.366 ; 119.863,46.366 124.816,46.366 ; 124.816,46.366 129.769,46.366 ; 129.769,46.366 134.874,46.366 ; 134.874,46.366 139.751,46.366 ; 139.751,46.366 145.009,46.366 ; 145.009,46.366 149.936,46.366 150.081,46.221
  Top Layer w2: P2.20@105.512,44.151 106.426,45.066 106.426,45.756 ; D1.1@154.178,42.124 P1.1@159.258,42.124
pads on no net: 1.0 ?.0 MCU1.1 MCU1.2 MCU1.3 MCU1.4 MCU1.8 MCU1.9 MCU1.10 MCU1.11 MCU1.17 MCU1.20 MCU1.41 MCU1.50 MCU1.55 MCU1.57 MCU1.58 MCU1.59 MCU1.61 MCU1.62 P2.17 P2.18 U1.3 U2.5 U5.9 U6.10 U7.10 US1.0 US1.2 US1.20 US1.21 US1.24 US2.0 US2.2 US2.20 US2.21 US2.24 US3.0 US3.2 US3.20 US3.21 US3.24 US4.0 US4.2 US4.20 US4.21 US4.24 US5.0 US5.2 US5.20 US5.21 US5.24 US6.0 US6.2 US6.10 US6.11 US6.13 US6.14 US6.15 US6.16 US6.17 US6.18 US6.20 US6.21 US6.24

## Polygon pours and split planes (outlines as drawn)
GND on Top Layer "Top Layer-No Net 1" (solid, remove dead copper, pour order 31): 0.203,0.152 15.073,0.091 ccw(c15.073,1.081) 16.064,1.081 16.027,11.735 cw(c17.196,11.735) 17.196,12.903 172.796,12.903 cw(c172.796,10.363) 175.336,10.363 175.336,0.406 ccw(c177.495,0.406) 177.495,-1.753 189.89,-1.753 ccw(c189.89,-1.651) 189.992,-1.651 189.992,47.223 cw(c190.076,47.223) 190.076,47.307 0.076,47.307
NetC9_1 on Top Layer "Top Layer-No Net 1" (solid, pour order 20): 164.567,32.741 cw(c164.567,33.884) 163.424,33.884 163.473,35.637 cw(c163.651,35.637) 163.651,35.815 179.984,35.789 cw(c179.984,35.103) 180.67,35.103 180.67,32.36 cw(c179.934,32.36) 179.934,31.623 173.406,31.623 cw(c173.406,32.69) 172.339,32.69 172.369,32.466 ccw(c172.267,32.466) 172.267,32.567 172.288,32.639 172.314,32.588 170.688,32.639 167.418,32.684 ccw(c167.418,32.531) 167.265,32.531 164.578,32.549 ccw(c164.451,32.549) 164.451,32.676 164.313,32.766
VCC3.3V on Top Layer "Top Layer-No Net 1" (solid, pour order 24): 181.737,18.618 cw(c182.228,18.128) 182.228,18.821 182.88,18.821 183.16,18.821 ccw(c183.16,19.862) 183.896,19.126 ccw(c183.528,19.494) 184.048,19.494 184.048,21.438 186.125,21.438 cw(c186.125,21.177) 186.309,21.361 cw(c185.634,20.687) 186.588,20.687 186.588,17.348 cw(c185.607,17.348) 186.301,16.654 186.03,16.383 cw(c185.846,16.567) 185.846,16.307 181.788,16.307 181.788,18.255 cw(c182.482,18.255) 181.991,18.745
NetC12_1 on Top Layer "Top Layer-No Net 1" (solid, pour order 18): 171.094,25.324 ccw(c171.094,26.568) 172.339,26.568 172.339,27.686 cw(c173.66,27.686) 173.66,29.007 179.807,29.007 cw(c179.807,28.016) 180.797,28.016 180.797,22.25 ccw(c181.153,22.25) 181.153,21.895 181.915,21.895 ccw(c181.915,23.47) 183.49,23.47 cw(c184.429,23.47) 184.429,24.409 185.877,24.409 cw(c185.877,23.19) 187.096,23.19 187.096,22.631 cw(c186.411,22.631) 186.411,21.946 184.226,21.946 ccw(c184.226,20.599) 182.88,20.599 182.893,20.332 cw(c182.588,20.332) 182.588,20.028 178.479,20.022 ccw(c178.479,19.565) 178.022,19.565 178.029,19.126 cw(c177.724,19.126) 177.724,18.821 172.263,18.821 cw(c172.263,21.361) 169.723,21.361 169.723,25.222 cw(c169.824,25.222) 169.824,25.324
GND on Bottom Layer "Top Layer-No Net 1" (solid, remove dead copper, pour order 33): 0.102,47.371 0.102,-1.79 14.503,-1.79 ccw(c14.503,-0.216) 16.078,-0.216 16.078,9.614 cw(c17.348,9.614) 17.348,10.884 173.838,10.884 cw(c173.838,9.36) 175.362,9.36 175.362,0.318 ccw(c177.317,0.318) 177.317,-1.638 189.949,-1.638 cw(c189.949,-1.79) 190.102,-1.79 190.102,47.371 0.102,47.371
VCC3.3V on Bottom Layer "Top Layer-No Net 1" (solid, pour order 26): 182.601,19.634 183.68,19.634 ccw(c183.68,20.155) 184.048,19.787 cw(c184.478,19.357) 184.478,19.964 185.293,19.964 cw(c185.293,18.615) 186.247,19.569 186.36,19.456 cw(c185.931,19.027) 186.538,19.027 186.538,17.628 cw(c185.434,17.628) 186.214,16.847 185.979,16.612 cw(c185.55,17.041) 185.55,16.434 183.21,16.434 cw(c183.21,17.906) 182.17,16.865 181.889,17.145 cw(c182.196,17.452) 181.762,17.452 181.762,19.406

## Keep-outs
Keep-Out Layer:
  lines w0.254: 94.717,49.454 94.717,47.752 ; 96.545,47.752 94.717,47.752 ; 100.178,-4.42 101.676,-2.921 ; 101.651,-2.845 101.676,-2.845 101.676,-2.921 ; 103.251,-4.343 101.829,-2.921 ; 130.175,-12.344 130.099,-12.268 106.68,-12.268 101.829,-7.417 101.829,-2.921 ; 137.897,52.603 99.568,52.603 94.717,47.752 ; 190,46.95 190,42.766 190,0 0,0 0,42.766 0,47.129 190,47.129 ; 101.676,-2.921 101.829,-2.921
  text "加工艺边" at 101.6,53.467 h10
  text "加工艺边" at 108.255,-11.481 h10

## Silkscreen, mask and mechanical layers (free items; w line width, h text height)
Top Overlay:
  drawing of 457 lines, arcs and shapes, not listed
  text "RST" at 61.824,45.883 h1
  text "DAT" at 56.591,45.756 h1
  text "CLK" at 59.08,44.918 h1
  text "VCC" at 64.287,44.867 h1
  text "GND" at 53.585,44.74 h1
  text "CL" at 177.952,36.79 h1
  text "CH" at 173.431,36.765 h1
  text "A" at 166.624,36.739 h1
  text "GND" at 161.646,36.689 h1
  text "B" at 170.536,36.689 h1
  text "+24V" at 157.099,36.612 h1
Bottom Overlay:
  text "图号：LY.LYJ.001" at 25.629,28.459 h2.5
  text "V1.2" at 11.938,26.289 h1
  text "2016.5.18" at 25.527,26.046 h2.5
  text "www.agv100.com" at 25.832,24.166 h2.5

## Text inside footprints (layer, text, board x,y; h text height)
C2: Top Overlay "C" at 49.518,19.836 h0.8 r180
C3: Top Overlay "C" at 78.989,19.836 h0.8 r180
C4: Top Overlay "C" at 19.553,19.836 h0.8 r180
C5: Top Overlay "C" at 48.904,17.664 h0.85 r180
C6: Top Overlay "C" at 78.376,17.664 h0.85 r180
C7: Top Overlay "C" at 18.94,17.664 h0.85 r180
C8: Top Overlay "C" at 133.541,24.319 h0.8 r90
C9: Top Overlay "C" at 162.941,34.25 h0.8
C10: Top Overlay "C" at 161.607,26.656 h0.8 r270
C11: Top Overlay "C" at 164.528,25.97 h0.8 r90
C14: Top Overlay "C" at 109.215,19.836 h0.8 r180
C15: Top Overlay "C" at 139.187,19.201 h0.8 r180
C16: Top Overlay "C" at 160.65,19.836 h0.8 r180
C17: Top Overlay "C" at 108.602,17.664 h0.85 r180
C18: Top Overlay "C" at 138.574,17.029 h0.85 r180
C19: Top Overlay "C" at 160.037,17.664 h0.85 r180
C20: Top Overlay "C" at 41.77,27.9 h0.8 r270
C21: Top Overlay "C" at 41.77,35.8 h0.8 r270
C22: Top Overlay "C" at 55.728,25.068 h0.8 r180
C23: Top Overlay "C" at 51.464,30.237 h0.8 r90
C24: Top Overlay "C" at 61.57,33.933 h0.8
C25: Top Overlay "C" at 70.815,16.28 h0.8
C26: Top Overlay "C" at 63.983,16.127 h0.8
C27: Top Overlay "C" at 75.248,29.577 h0.8 r270
C30: Top Overlay "+" at 181.303,17.094 h1 r270
C31: Top Overlay "C" at 181.623,22.2 h0.8 r270
L1: Top Overlay "L" at 175.285,31.38 h3 r270
L2: Top Overlay "L" at 184.658,22.098 h0.8 r270
MCU1: Top Overlay "TQFP64" at 62.23,22.439 h0.85; Top Overlay "STM32" at 62.738,26.376 h0.85; Top Overlay "*" at 60.808,30.034 h0.85
R1: Top Overlay "R" at 49.533,21.553 h0.8 r180
R2: Top Overlay "R" at 79.008,21.553 h0.8 r180
R3: Top Overlay "R" at 19.568,21.553 h0.8 r180
R4: Top Overlay "R" at 158.626,28.563 h0.8 r90
R5: Top Overlay "R" at 68.329,6.057 h0.8 r90
R6: Top Overlay "R" at 72.006,6.663 h0.8 r270
R7: Top Overlay "R" at 58.169,6.057 h0.8 r90
R8: Top Overlay "R" at 61.973,6.663 h0.8 r270
R9: Top Overlay "R" at 47.117,6.691 h0.8 r270
R10: Top Overlay "R" at 51.94,6.663 h0.8 r270
R11: Top Overlay "R" at 98.174,6.057 h0.8 r90
R12: Top Overlay "R" at 102.105,6.663 h0.8 r270
R13: Top Overlay "R" at 87.887,6.057 h0.8 r90
R14: Top Overlay "R" at 93.221,6.057 h0.8 r90
R15: Top Overlay "R" at 77.086,6.663 h0.8 r270
R16: Top Overlay "R" at 82.166,6.663 h0.8 r270
R17: Top Overlay "R" at 38.103,6.057 h0.8 r90
R18: Top Overlay "R" at 42.161,6.663 h0.8 r270
R19: Top Overlay "R" at 27.816,6.057 h0.8 r90
R20: Top Overlay "R" at 32.382,6.663 h0.8 r270
R21: Top Overlay "R" at 17.015,6.663 h0.8 r270
R22: Top Overlay "R" at 22.222,6.663 h0.8 r270
R23: Top Overlay "R" at 160.706,26.023 h0.8 r90
R24: Top Overlay "R" at 140.716,28.281 h0.8
R25: Top Overlay "R" at 144.91,24.372 h0.8 r90
R26: Top Overlay "R" at 169.217,24.407 h0.8
R27: Top Overlay "R" at 169.822,26.876 h0.8 r180
R28: Top Overlay "R" at 77.061,40.095 h0.8 r180
R29: Top Overlay "R" at 109.23,21.553 h0.8 r180
R30: Top Overlay "R" at 139.202,20.918 h0.8 r180
R31: Top Overlay "R" at 160.059,20.781 h0.8
R32: Top Overlay "R" at 138.148,38.317 h0.8 r180
R33: Top Overlay "R" at 131.29,32.729 h0.8 r180
R34: Top Overlay "R" at 135.382,30.745 h0.8 r180
R35: Top Overlay "R" at 128.019,6.057 h0.8 r90
R36: Top Overlay "R" at 132.077,6.663 h0.8 r270
R37: Top Overlay "R" at 117.859,6.057 h0.8 r90
R38: Top Overlay "R" at 122.298,6.663 h0.8 r270
R39: Top Overlay "R" at 106.804,6.663 h0.8 r270
R40: Top Overlay "R" at 112.265,6.663 h0.8 r270
R41: Top Overlay "R" at 158.118,6.057 h0.8 r90
R42: Top Overlay "R" at 162.049,6.663 h0.8 r270
R43: Top Overlay "R" at 147.831,6.057 h0.8 r90
R44: Top Overlay "R" at 153.165,6.057 h0.8 r90
R45: Top Overlay "R" at 137.284,6.663 h0.8 r270
R46: Top Overlay "R" at 142.11,6.663 h0.8 r270
R47: Top Overlay "R" at 168.024,6.057 h0.8 r90
R48: Top Overlay "R" at 172.082,6.663 h0.8 r270
R49: Top Overlay "R" at 144.63,34.837 h0.8 r90
R50: Top Overlay "R" at 143.863,32.602 h0.8 r180
R51: Top Overlay "R" at 142.852,34.786 h0.8 r90
R52: Top Overlay "R" at 143.284,30.057 h0.8
R53: Top Overlay "R" at 51.452,33.973 h0.8 r90
R54: Top Overlay "R" at 66.139,34.761 h0.8 r180
R55: Top Overlay "R" at 56.162,37.169 h0.8
R56: Top Overlay "R" at 56.162,38.947 h0.8
R57: Top Overlay "R" at 70.33,40.095 h0.8 r180
R58: Top Overlay "R" at 56.162,40.852 h0.8
R59: Top Overlay "R" at 11.652,36.92 h0.8 r90
R60: Top Overlay "R" at 14.209,36.92 h0.8 r90
R61: Top Overlay "R" at 16.766,36.92 h0.8 r90
R62: Top Overlay "R" at 19.323,36.92 h0.8 r90
R63: Top Overlay "R" at 21.88,36.92 h0.8 r90
R64: Top Overlay "R" at 24.437,36.92 h0.8 r90
R65: Top Overlay "R" at 26.994,36.92 h0.8 r90
R66: Top Overlay "R" at 29.551,36.92 h0.8 r90
R67: Top Overlay "R" at 94.634,35.98 h0.8 r90
R68: Top Overlay "R" at 97.343,35.98 h0.8 r90
R69: Top Overlay "R" at 100.053,35.98 h0.8 r90
R70: Top Overlay "R" at 102.635,35.98 h0.8 r90
R71: Top Overlay "R" at 105.26,35.98 h0.8 r90
R72: Top Overlay "R" at 107.969,35.98 h0.8 r90
R73: Top Overlay "R" at 110.678,35.98 h0.8 r90
R74: Top Overlay "R" at 113.388,35.98 h0.8 r90
U4: Top Overlay "SOP16" at 30.709,29.627 h1; Top Overlay "*" at 28.092,27.824 h1 r90
U5: Top Overlay "SOP16" at 113.081,28.053 h1; Top Overlay "*" at 110.465,26.249 h1 r90
X1: Top Overlay "XT" at 45.61,32.675 h0.85 r270